# Altium PCB A5000_4MB.pcbdoc
Units mm, origin at the board's own origin, x right, y up, seen from the top; angles counter-clockwise.
Board outline 94.49 x 40.64 mm, 4 copper layers (TopLayer, GND, VCC, BottomLayer), stack 1.659 mm thick; 13 components, 51 nets, 167 pads, 114 vias.
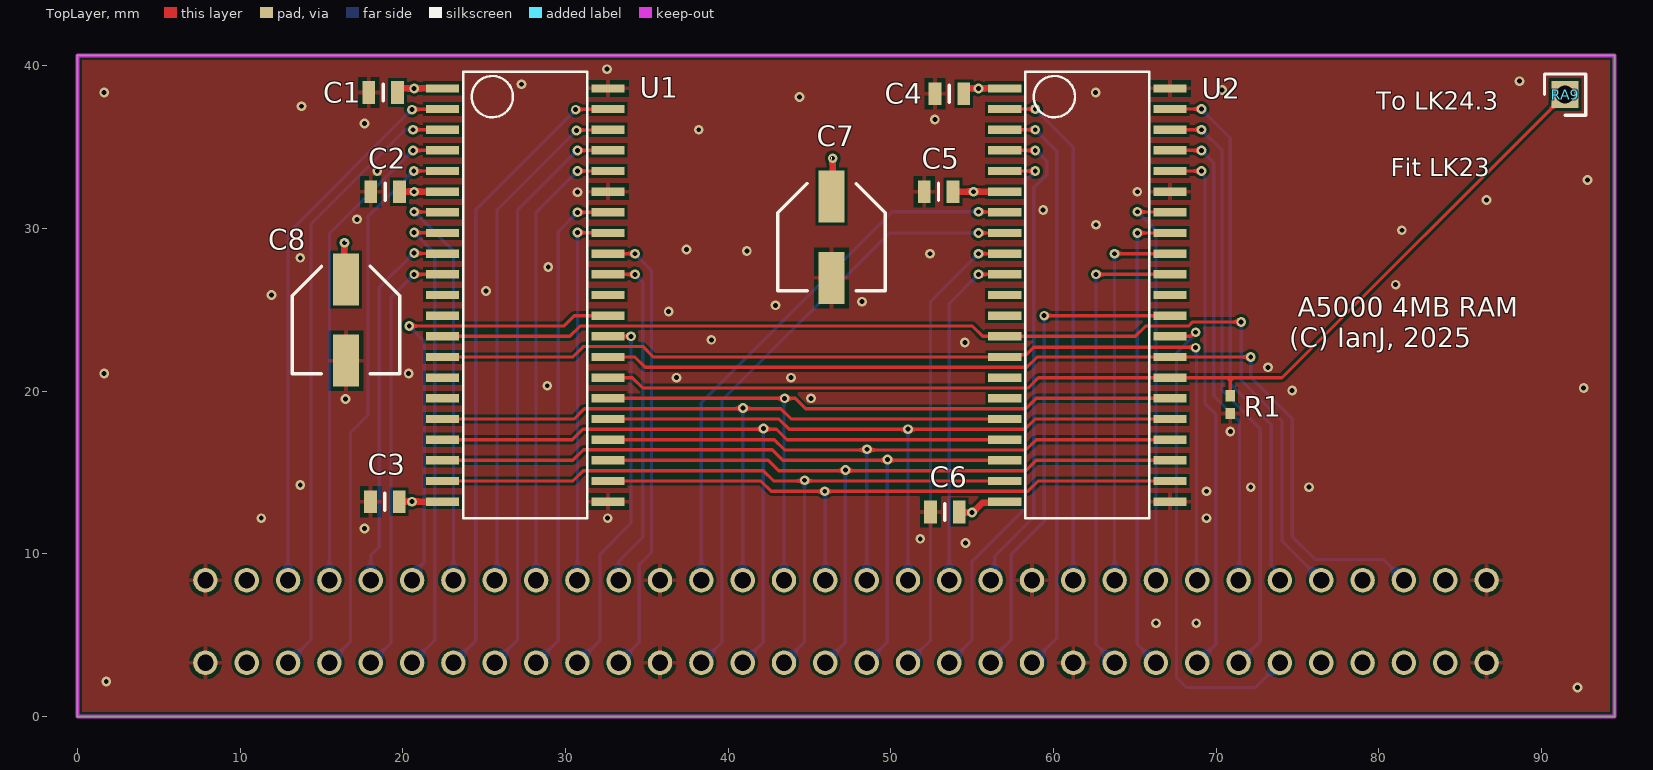
[diagram p0: TopLayer view]
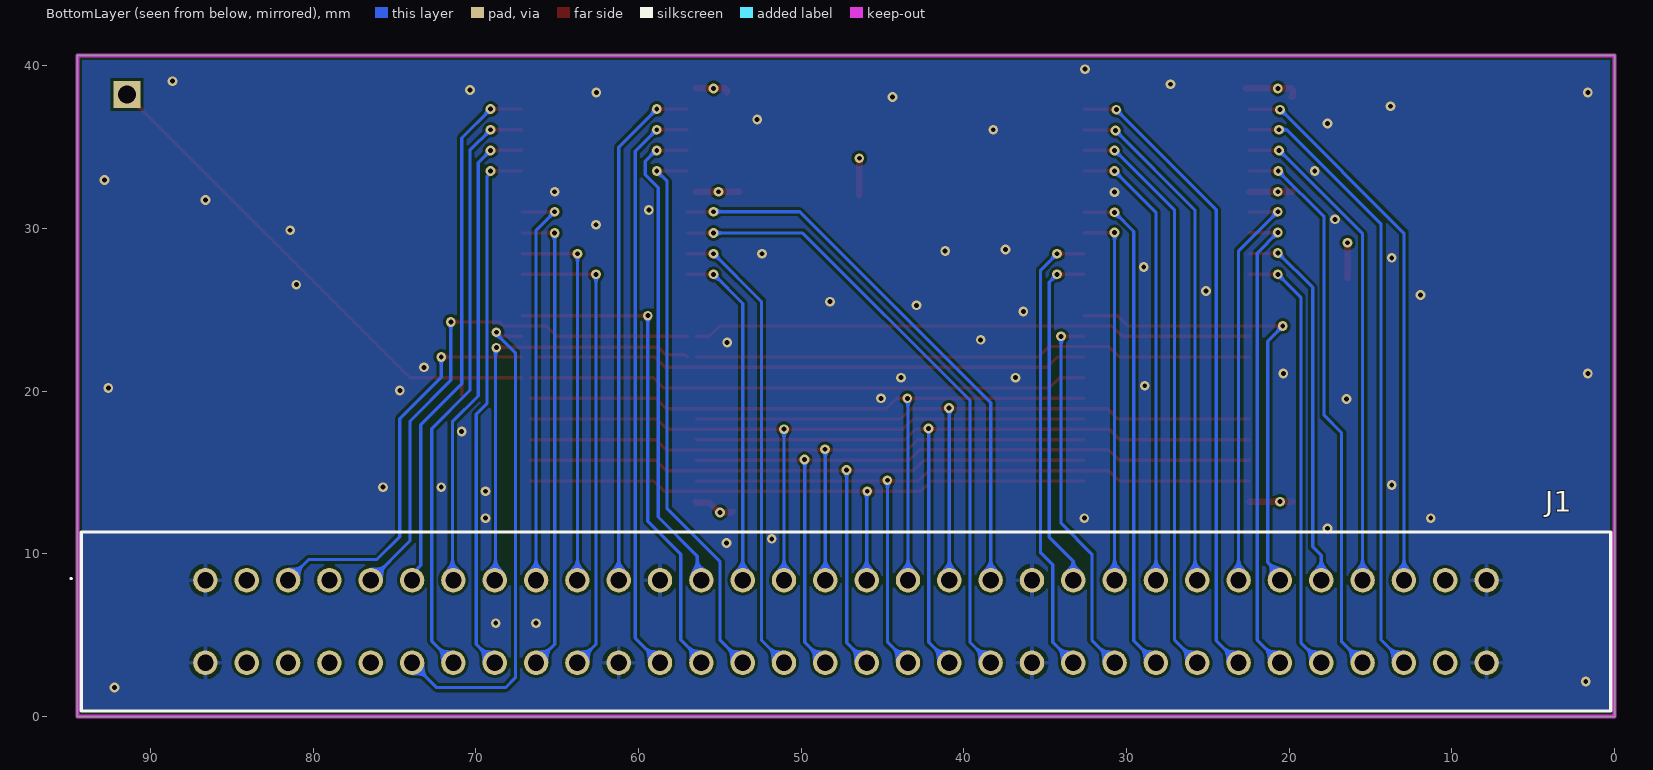
[diagram p1: BottomLayer view, seen from below]
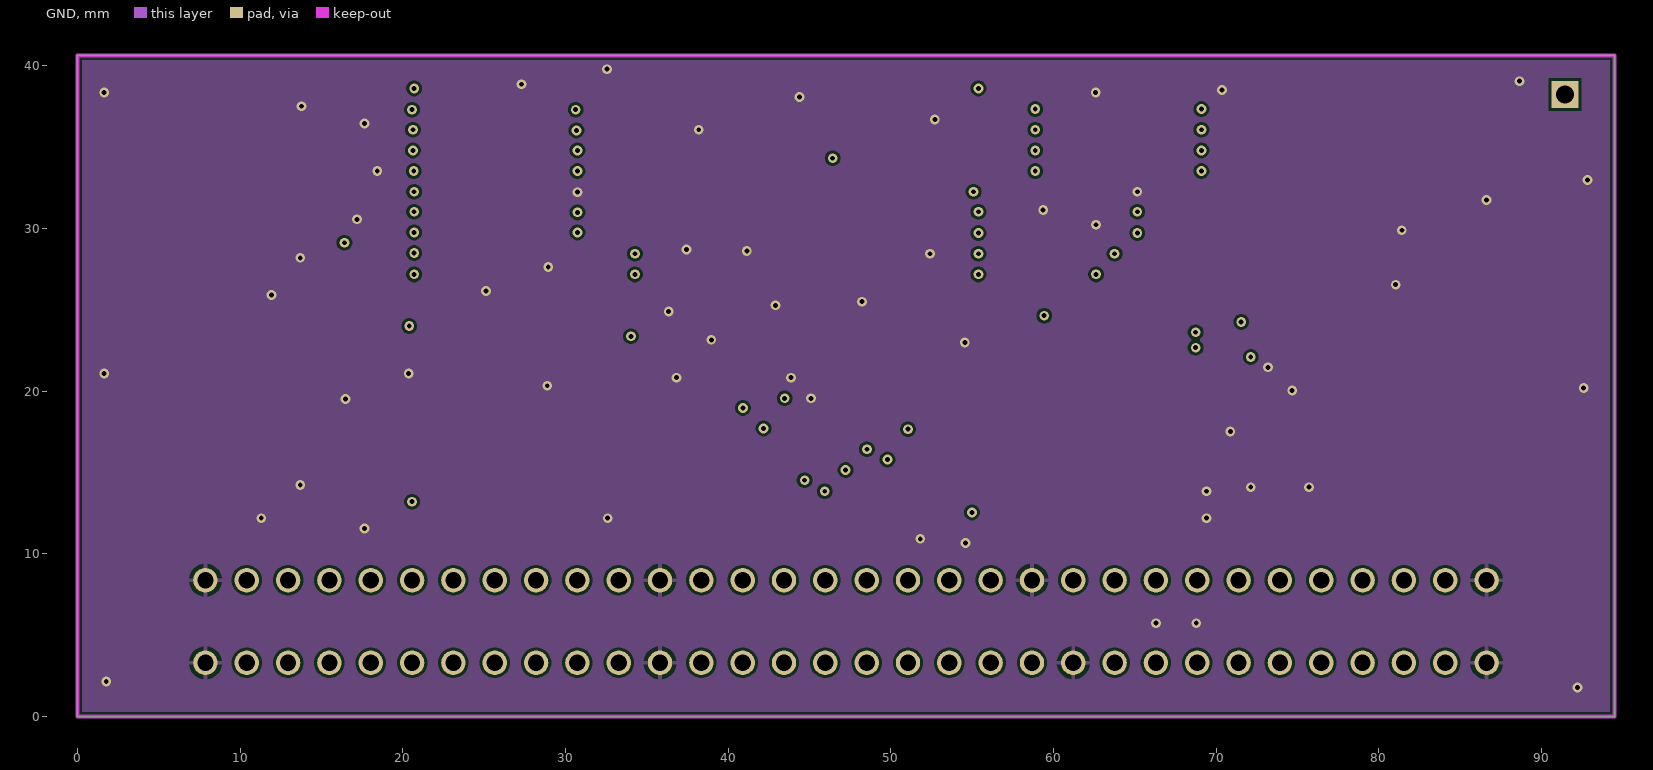
[diagram p2: GND]
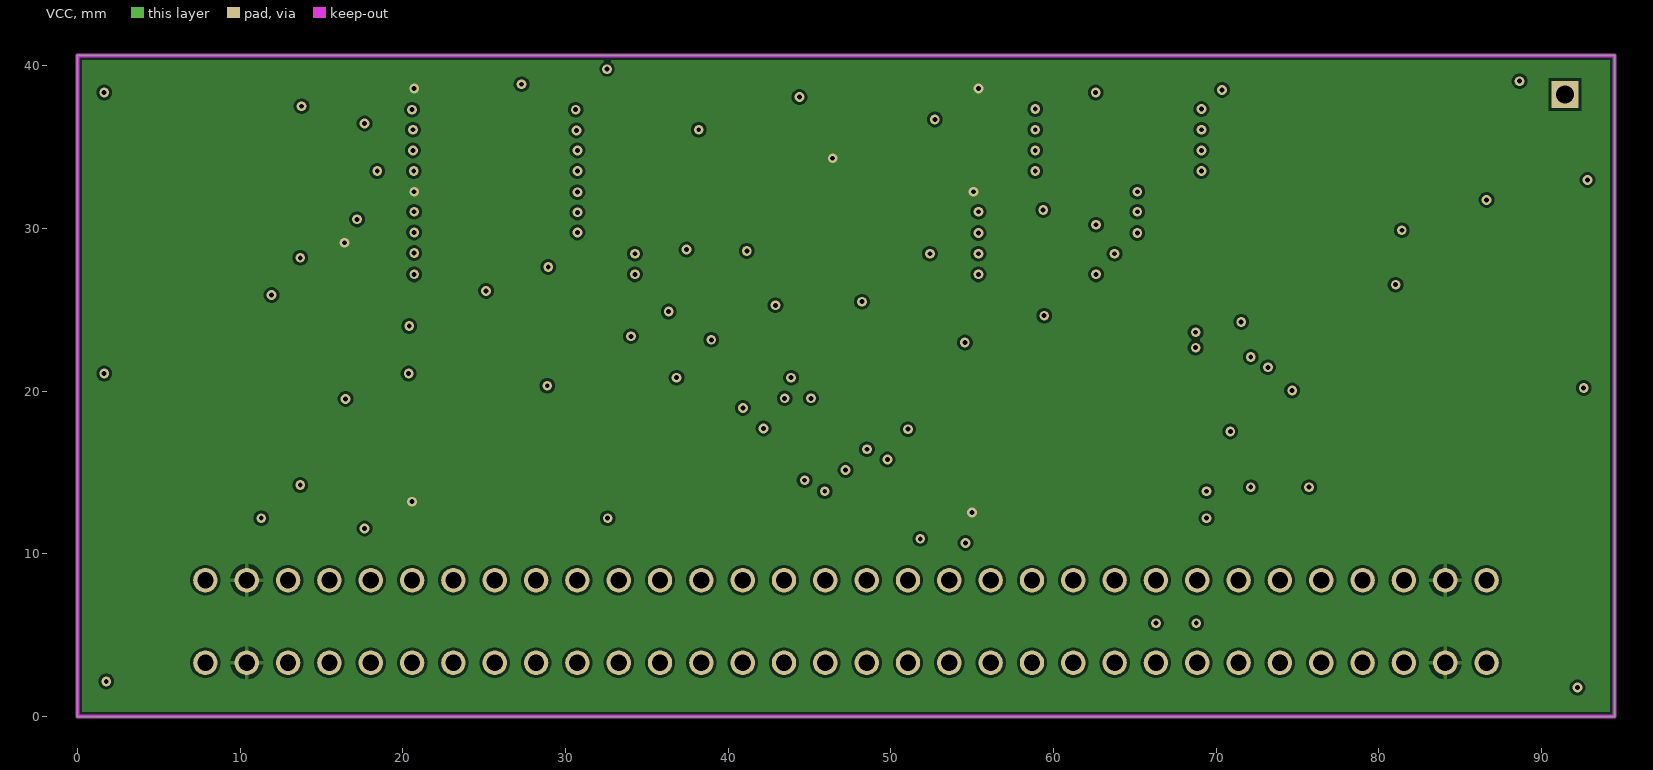
[diagram p3: VCC]
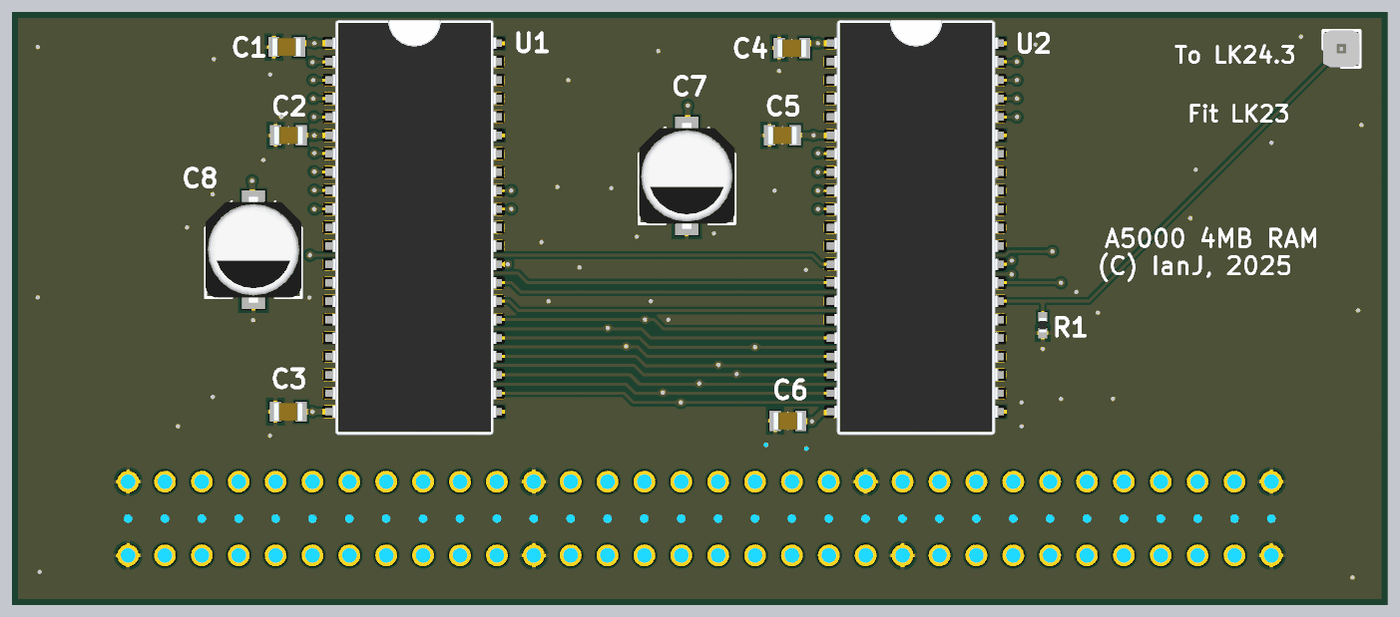
[diagram p4: 3D render of the assembled board from above, using the file's embedded part models]

## Layer stack, top to bottom
TopSolder: solder mask 0.01, Solder Resist, Dk 3.5
TopLayer: signal copper 0.036
Dielectric 1: prepreg 0.2083, PP-022, Dk 4.5
GND: signal copper 0.035
Dielectric 2: core 1.1, Core-043, Dk 4.3
VCC: signal copper 0.035
Dielectric 3: prepreg 0.2083, PP-022, Dk 4.5
BottomLayer: signal copper 0.036
BottomSolder: solder mask 0.01, Solder Resist, Dk 3.5

## Board outline
0,40.64 0,0 94.488,0 94.488,40.64

## Design rules (kind name [scope] priority, off if disabled: settings)
BoardOutlineClearance [All] p1: gap=0 ignorepadtopadclearanceinfootprint=FALSE
Clearance [All] p1: gap=0.17 ignorepadtopadclearanceinfootprint=FALSE except(0.3: Via-Via; 0.5: Via-Hole)
ComponentClearance ComponentClearance_Z2_Z3 [(InComponent('Z2') OR InComponent('Z3')) vs InComponent('No Component')] p1: gap=0 collisioncheckmode=3 verticalgap=0 showdistances=FALSE
ComponentClearance ComponentClearance_U4_J104 [All] p2: gap=0 collisioncheckmode=3 verticalgap=0 showdistances=FALSE
ComponentClearance ComponentClearance_J3_J4 [InComponent('J3') vs InComponent('J4')] p3: gap=0 collisioncheckmode=3 verticalgap=0 showdistances=FALSE
ComponentClearance ComponentClearance_J103_J104 [InComponent('J103') vs InComponent('J104')] p4: gap=0 collisioncheckmode=3 verticalgap=0 showdistances=FALSE
ComponentClearance [All] p5: gap=0.254 collisioncheckmode=3 verticalgap=0.254 showdistances=FALSE
DiffPairsRouting [InDifferentialPairClass('All Differential Pairs')] p1: maxlimit=0.254 minlimit=0.114 mostfreqgap=0.17 toplayer_mingap=0.17 toplayer_minwidth=0.2 toplayer_maxwidth=0.381 toplayer_prefwidth=0.237 midlayer1_prefgap=0.115 midlayer1_minwidth=0.381 midlayer1_maxwidth=0.381 midlayer1_prefwidth=0.381 midlayer2_prefgap=0.115 midlayer2_minwidth=0.381 midlayer2_maxwidth=0.381 midlayer2_prefwidth=0.381 bottomlayer_mingap=0.17 bottomlayer_minwidth=0.2 bottomlayer_maxwidth=0.381 bottomlayer_prefwidth=0.237 maxuncoupledlength=12.7
FabricationTestPointUsage TestPointUsage [All] p1: valid=0 allowmultiple=FALSE
FabricationTestpoint Testpoint [All] p1: side=3 testpointundercomponent=TRUE minsize=1.016 maxsize=2.54 preferedsize=1.524 minholesize=0.508 maxholesize=1.016 preferedholesize=0.813 testpointgrid=0.025 allowsidetop=TRUE allowsidebottom=TRUE usegrid=TRUE gridtolerance=0
HoleSize [All] p1: absolutevalues=TRUE maxlimit=5 minlimit=0.3 maxpercent=80.000 minpercent=20.000
HoleToHoleClearance [All] p1: gap=0.25 allowstackedmicrovias=FALSE
MinimumSolderMaskSliver [All] p1: minsoldermaskwidth=0.02
PlaneClearance [All] p1: clearance=0.2
PlaneConnect [All] p1: pad.planeconnectstyle=Relief pad.reliefexpansion=0.508 pad.reliefentries=4 pad.reliefconductorwidth=0.254 pad.reliefairgap=0.254 via.planeconnectstyle=Direct via.reliefexpansion=0.508 via.reliefentries=4 via.reliefconductorwidth=0.254 via.reliefairgap=0.254
PolygonConnect [All] p1: thpad.connectstyle=Relief thpad.reliefconductorwidth=0.254 thpad.reliefentries=4 thpad.polygonreliefangle="90 Angle" thpad.airgapwidth=0.254 smdpad.connectstyle=Relief smdpad.reliefconductorwidth=0.254 smdpad.reliefentries=4 smdpad.polygonreliefangle="90 Angle" smdpad.airgapwidth=0.254 via.connectstyle=Direct via.reliefconductorwidth=0.254 via.reliefentries=4 via.polygonreliefangle="90 Angle" via.airgapwidth=0.254
RoutingVias [All] p1: holewidth=0.4 width=0.8 viastyle="Through Hole" minholewidth=0.3 minwidth=0.6 maxholewidth=0.4 maxwidth=0.8
SilkToSilkClearance [All] p1: silktosilkclearance=0.1
SilkToSolderMaskClearance SilkscreenOverComponentPads [IsPad] p1: minsilkscreentomaskgap=0.1 clearancetoexposedcopper=TRUE
SolderMaskExpansion [All] p1: expansion=0.075 istentingtop=FALSE
SupplyNets "Schematic Supply Nets_1" [InNet('GND')] p1: voltage=0.000
SupplyNets "Schematic Supply Nets" [InNet('VCC')] p2: voltage=0.000
Width [All] p1: maxlimit=5 minlimit=0.15 preferedwidth=0.2
19 further rules are at their usual default settings.

## Components (designator, comment, footprint, x,y, rotation, side; value= is the part's Value field where it differs from the comment)
C1 "100nF" 0805cap 18.796,38.354 r180 top
C2 "100nF" 0805cap 18.923,32.258 r180 top
C3 "100nF" 0805cap 18.901,13.208 r180 top
C4 "100nF" 0805cap 53.594,38.274 r180 top
C5 "100nF" 0805cap 52.937,32.258 r180 top
C6 "100nF" 0805cap 53.318,12.573 r180 top
C7 "47uF" EEE1AA101SP 46.355,29.464 r270 top
C8 "47uF" EEE1AA101SP 16.51,24.373 r270 top
J1 "09031646922" 09031646922 86.614,8.382 r0 bottom locked
R1 "10K" RESC1005X40N 70.866,19.177 r90 top
RA9 "90120-0761" HDRV1W90P0X254_1X1_232X249X560P 91.44,38.227 r90 top
U1 "IS41C16105C" SOJ-42 27.537,25.908 r270 top locked
U2 "IS41C16105C" SOJ-42 62.081,25.908 r270 top locked

## Footprints (in the part's own frame and the unit in brackets; to place one, negate y for a bottom-side part, rotate by r counter-clockwise, add the part's x,y. Pads: shape width x height; smd on the part's side, far side on the other; paste and mask are expansions set on the pad)
0805cap [mm]
  rect 0.78x1.39 smd: 1(-0.88,0) 2(0.88,0)
  silkscreen extent 0,-0.53 0,0.53, body extent -1,-0.63 1,0.63, height 0.6
09031646922 [mm]
  round 1.5 hole 1: A1(0,0) A2(-2.54,0) A3(-5.08,0) A4(-7.62,0) A5(-10.16,0) A6(-12.7,0) A7(-15.24,0) A8(-17.78,0) A9(-20.32,0) A10(-22.86,0) A11(-25.4,0) A12(-27.94,0) A13(-30.48,0) A14(-33.02,0) A15(-35.56,0) A16(-38.1,0) A17(-40.64,0) A18(-43.18,0) A19(-45.72,0) A20(-48.26,0) A21(-50.8,0) A22(-53.34,0) A23(-55.88,0) A24(-58.42,0) A25(-60.96,0) A26(-63.5,0) A27(-66.04,0) A28(-68.58,0) A29(-71.12,0) A30(-73.66,0) A31(-76.2,0) A32(-78.74,0) C1(0,5.08) C2(-2.54,5.08) C3(-5.08,5.08) C4(-7.62,5.08) C5(-10.16,5.08) C6(-12.7,5.08) C7(-15.24,5.08) C8(-17.78,5.08) C9(-20.32,5.08) C10(-22.86,5.08) C11(-25.4,5.08) C12(-27.94,5.08) C13(-30.48,5.08) C14(-33.02,5.08) C15(-35.56,5.08) C16(-38.1,5.08) C17(-40.64,5.08) C18(-43.18,5.08) C19(-45.72,5.08) C20(-48.26,5.08) C21(-50.8,5.08) C22(-53.34,5.08) C23(-55.88,5.08) C24(-58.42,5.08) C25(-60.96,5.08) C26(-63.5,5.08) C27(-66.04,5.08) C28(-68.58,5.08) C29(-71.12,5.08) C30(-73.66,5.08) C31(-76.2,5.08) C32(-78.74,5.08)
  silkscreen extent -86.37,-2.96 8.3,8.04, body extent -86.37,-2.96 7.63,8.04, height 13.15
EEE1AA101SP [mm]
  rect 3.2x1.6 smd: 1(-2.5,0) 2(2.5,0)
  silkscreen extent -4.88,-3.3 3.3,3.3, body extent 0,0 0,0
HDRV1W90P0X254_1X1_232X249X560P [mm]
  rect 1.65x1.65 hole 1.1: 1(0,0)
  silkscreen extent -1.27,-1.27 1.27,1.27, body extent -1.27,-1.25 1.27,1.25, height 5.37
RESC1005X40N [mm]
  rect 0.7x0.6 smd: 1(-0.55,0) 2(0.55,0)
  body extent -0.5,-0.25 0.5,0.25, height 0.4
SOJ-42 [mil]
  rect 20x80 smd mask+7.87: 1(-500,-200) 2(-450,-200) 3(-400,-200) 4(-350,-200) 5(-300,-200) 6(-250,-200) 7(-200,-200) 8(-150,-200) 9(-100,-200) 10(-50,-200) 11(0,-200) 12(50,-200) 13(100,-200) 14(150,-200) 15(200,-200) 16(250,-200) 17(300,-200) 18(350,-200) 19(400,-200) 20(450,-200) 21(500,-200) 22(500,200) 23(450,200) 24(400,200) 25(350,200) 26(300,200) 27(250,200) 28(200,200) 29(150,200) 30(100,200) 31(50,200) 32(0,200) 33(-50,200) 34(-100,200) 35(-150,200) 36(-200,200) 37(-250,200) 38(-300,200) 39(-350,200) 40(-400,200) 41(-450,200) 42(-500,200)
  silkscreen extent -540,-150 540,150, body extent -563,-220 563,225, height 149

## Part data
C1 C2 C3 C4 C5 C6: library part 100nF0805, "Capacitor", Arrow Part Number=C2012X7R1H104K125AM, LCSC Part #=C111492, Manufacturer_Name=TDK, Mouser Part Number=810-C2012X7R1H104KT5, Arrow Price/Stock=https://www.arrow.com/en/products/c2012x7r1h104k125am/tdk, Datasheet Link=https://product.tdk.com/info/en/catalog/datasheets/mlcc_commercial_midvoltage_en.pdf, Height=1.45mm, Manufacturer_Part_Number=C2012X7R1H104K125AM, Mouser Price/Stock=https://www.mouser.com/Search/Refine.aspx?Keyword=810-C2012X7R1H104KT5
C7 C8: library part EEE1VA470WP, "Capacitor Polarised", Manufacturer_Name=Panasonic, Datasheet Link=http://industrial.panasonic.com/cdbs/www-data/pdf/RDE0000/ABA0000C1145.pdf, Height=7.8mm, Manufacturer_Part_Number=EEE1VA470WP
J1: "Connector", Manufacturer_Name=HARTING, Mouser Part Number=617-09-03-164-6922, Arrow Part Number=09031646922, Arrow Price/Stock=https://www.arrow.com/en/products/09031646922/harting?region=nac, Datasheet Link=https://b2b.harting.com/files/download/PRD/PDF_DS/PDF_DS_09031200201.pdf, Manufacturer_Part_Number=09031646922, Mouser Price/Stock=https://www.mouser.co.uk/ProductDetail/HARTING/09031646922?qs=UV5Tb6pF94VtKUzITEf3rQ%3D%3D
R1: library part CRCW040210K0FKEDHP, "Resistor", LCSC Part #=C71617, Manufacturer_Name=Vishay, Mouser Part Number=71-CRCW040210K0FKEDH, Arrow Part Number=CRCW040210K0FKEDHP, Arrow Price/Stock=https://www.arrow.com/en/products/crcw040210k0fkedhp/vishay?region=nac, Datasheet Link=http://www.vishay.com/docs/20035/dcrcwe3.pdf, Height=0.4mm, Manufacturer_Part_Number=CRCW040210K0FKEDHP, Mouser Price/Stock=https://www.mouser.co.uk/ProductDetail/Vishay-Dale/CRCW040210K0FKEDHP?qs=FlFvgi4rxBxmIiaeyFjrkA%3D%3D
RA9: "Connector", Manufacturer_Name=Molex, Mouser Part Number=538-90120-0761, Datasheet Link=https://www.molex.com/pdm_docs/sd/901200761_sd.pdf, Height=5.6mm, Manufacturer_Part_Number=90120-0761, Mouser Price/Stock=https://www.mouser.co.uk/ProductDetail/Molex/90120-0761?qs=PvP5v7Eimsn%2F58TpDaAAow%3D%3D
U1 U2: library part DRAM_1MX16_SOJ

## Via types
v1: diameter 0.6, hole 0.3, TopLayer to BottomLayer, tented both sides, 114 vias

## Nets (pads, with @x,y where several pads share a name; then routed paths per layer and width w, separated by ;. In a path a pad name is that pad's centre, name@x,y a point inside that pad or via, vN(x,y) a via of type N, cw(c..) or ccw(c..) an arc to the next point about the centre after c; other vN are vias at no path point)
Cas0n: J1.A27 U1.31 | length 28.8
  TopLayer w0.2: v1(20.402,24.002) 29.896,24.002 30.532,24.638 U1.31
  BottomLayer w0.2: v1(20.402,24.002) 21.324,23.08 21.324,9.477 20.574,8.727 J1.A27
Cas1n: J1.C23 U1.30 | length 22.8
  TopLayer w0.2: U1.30 v1(34.024,23.368)
  BottomLayer w0.2: J1.C23 32.131,4.699 32.131,9.985 34.024,11.878 v1(34.024,23.368)
Cas2n: J1.C13 U2.31 | length 30.4
  TopLayer w0.2: v1(59.424,24.638) U2.31
  BottomLayer w0.2: J1.C13 56.134,3.451 57.404,4.721 57.404,9.979 59.424,11.999 v1(59.424,24.638)
Cas3n: J1.C6 U2.30 | length 30.6
  TopLayer w0.2: U2.30 68.432,23.368 68.686,23.622 v1(68.734,23.622)
  BottomLayer w0.2: v1(68.734,23.622) 68.734,23.522 67.564,22.352 67.564,2.387 68.173,1.778 72.39,1.778 J1.C6
D0: J1.C30 U1.3 | length 38
  TopLayer w0.2: v1(20.627,36.068) U1.3
  BottomLayer w0.2: J1.C30 14.356,4.704 14.356,30.258 20.167,36.068 v1(20.627,36.068)
D1: J1.A30 U1.2 | length 34
  TopLayer w0.2: v1(20.574,37.301) 20.593,37.319 22.438,37.319 U1.2
  BottomLayer w0.2: J1.A30 12.954,29.718 20.537,37.301 v1(20.574,37.301)
D2: J1.A29 U1.4 | length 30.4
  TopLayer w0.2: v1(20.627,34.798) U1.4
  BottomLayer w0.2: J1.A29 15.494,29.665 v1@20.622,34.793
D3: J1.C29 U1.5 | length 34.2
  TopLayer w0.2: v1(20.674,33.528) U1.5
  BottomLayer w0.2: J1.C29 16.784,4.592 16.784,17.427 17.862,18.505 17.862,30.715 v1(20.674,33.528)
D4: J1.A28 U1.9 | length 23
  TopLayer w0.2: v1(20.701,28.484) 20.719,28.466 22.439,28.466 U1.9
  BottomLayer w0.2: J1.A28 18.034,9.906 18.564,10.436 18.564,26.374 20.674,28.484 v1(20.701,28.484)
D5: J1.C28 U1.10 | length 26.7
  TopLayer w0.2: v1(20.701,27.178) U1.10
  BottomLayer w0.2: J1.C28 19.282,4.55 19.282,25.759 v1(20.701,27.178)
D6: J1.C27 U1.8 | length 29.3
  TopLayer w0.2: v1(20.701,29.754) 20.719,29.736 22.439,29.736 U1.8
  BottomLayer w0.2: J1.C27 21.971,4.699 21.971,28.484 v1(20.701,29.754)
D7: J1.A26 U1.7 | length 25.4
  TopLayer w0.2: v1(20.701,31.029) 20.722,31.009 22.436,31.009 U1.7
  BottomLayer w0.2: v1(20.701,31.029) 23.114,28.616 J1.A26
D8: J1.A25 U1.40 | length 31.8
  TopLayer w0.2: v1(30.674,36.026) 30.695,36.047 32.595,36.047 U1.40
  BottomLayer w0.2: J1.A25 25.793,8.521 25.793,31.127 v1@30.734,36.068
D9: J1.C26 U1.41 | length 39.2
  TopLayer w0.2: v1(30.629,37.301) 30.648,37.319 32.598,37.319 U1.41
  BottomLayer w0.2: J1.C26 24.484,4.672 24.484,31.148 v1@30.674,37.338
D10: J1.C25 U1.39 | length 35.5
  TopLayer w0.2: v1(30.734,34.798) U1.39
  BottomLayer w0.2: J1.C25 27.051,4.699 27.051,31.115 v1(30.734,34.798)
D11: J1.A24 U1.38 | length 28.1
  TopLayer w0.2: v1(30.734,33.528) U1.38
  BottomLayer w0.2: J1.A24 28.194,30.988 v1(30.734,33.528)
D12: J1.A23 U1.35 | length 23.3
  TopLayer w0.2: v1(30.734,29.754) 30.752,29.736 32.599,29.736 U1.35
  BottomLayer w0.2: J1.A23 v1(30.734,29.754)
D13: J1.C24 U1.36 | length 30.6
  TopLayer w0.2: v1(30.734,30.988) U1.36
  BottomLayer w0.2: J1.C24 29.557,4.665 29.557,29.811 v1(30.734,30.988)
D14: J1.A22 U1.33 | length 21.3
  TopLayer w0.2: U1.33 v1(34.268,27.178)
  BottomLayer w0.2: J1.A22 33.274,9.554 34.753,11.033 34.753,26.692 v1(34.268,27.178)
D15: J1.C22 U1.34 | length 28.1
  TopLayer w0.2: U1.34 v1(34.268,28.448)
  BottomLayer w0.2: J1.C22 34.544,4.572 34.544,9.329 35.284,10.068 35.284,27.432 v1(34.268,28.448)
D16: J1.C20 U2.8 | length 38.3
  TopLayer w0.2: v1(55.384,29.718) U2.8
  BottomLayer w0.2: J1.C20 39.624,4.572 39.624,19.431 49.911,29.718 v1(55.384,29.718)
D17: J1.A20 U2.7 | length 34.4
  TopLayer w0.2: v1(55.384,31.029) 55.405,31.009 56.98,31.009 U2.7
  BottomLayer w0.2: J1.A20 38.354,19.292 50.091,31.029 v1(55.384,31.029)
D18: J1.C15 U2.9 | length 28.6
  TopLayer w0.2: v1(55.384,28.448) U2.9
  BottomLayer w0.2: J1.C15 52.438,4.686 52.438,25.502 v1(55.384,28.448)
D19: J1.A14 U2.10 | length 21.2
  TopLayer w0.2: v1(55.384,27.178) U2.10
  BottomLayer w0.2: J1.A14 53.594,25.388 v1(55.384,27.178)
D20: J1.A13 U2.4 | length 30
  TopLayer w0.2: U2.4 v1(58.879,34.798)
  BottomLayer w0.2: J1.A13 56.383,8.631 56.383,9.862 58.785,12.265 58.785,32.508 59.584,33.307 59.584,34.142 58.928,34.798 v1(58.879,34.798)
D21: J1.C14 U2.5 | length 34.3
  TopLayer w0.2: U2.5 v1(58.879,33.528)
  BottomLayer w0.2: J1.C14 54.981,4.689 54.981,9.502 58.244,12.765 58.244,32.893 v1(58.879,33.528)
D22: J1.A11 U2.2 | length 31.8
  TopLayer w0.2: U2.2 v1(58.879,37.338)
  BottomLayer w0.2: v1(58.879,37.338) 61.214,35.003 J1.A11
D23: J1.C12 U2.3 | length 35.8
  TopLayer w0.2: U2.3 v1(58.879,36.068)
  BottomLayer w0.2: J1.C12 60.198,4.826 60.198,8.292 cw(c61.214,8.382) 60.198,8.472 60.198,34.749 v1(58.879,36.068)
D24: J1.C10 U2.33 | length 28.9
  TopLayer w0.2: v1(62.611,27.178) U2.33
  BottomLayer w0.2: v1(62.611,27.178) 62.611,4.445 J1.C10
D25: J1.A10 U2.34 | length 23.5
  TopLayer w0.2: v1(63.754,28.448) U2.34
  BottomLayer w0.2: J1.A10 v1(63.754,28.448)
D26: J1.A9 U2.36 | length 25.1
  TopLayer w0.2: v1(65.151,31.029) 65.172,31.009 67.14,31.009 U2.36
  BottomLayer w0.2: v1(65.151,31.029) 65.582,30.598 66.294,29.886 J1.A9
D27: J1.C9 U2.35 | length 28.9
  TopLayer w0.2: v1(65.151,29.718) U2.35
  BottomLayer w0.2: v1(65.151,29.718) 65.151,4.445 J1.C9
D28: J1.A7 U2.39 | length 29.3
  TopLayer w0.2: U2.39 v1(69.088,34.798)
  BottomLayer w0.2: v1(69.088,34.798) 69.85,34.036 69.85,19.7 71.436,18.114 71.436,8.444 J1.A7
D29: J1.C8 U2.38 | length 33
  TopLayer w0.2: U2.38 v1(69.088,33.528)
  BottomLayer w0.2: J1.C8 69.974,4.442 69.974,18.587 69.304,19.257 69.304,33.211 69.088,33.427 v1(69.088,33.528)
D30: J1.A6 U2.41 | length 32.9
  TopLayer w0.2: U2.41 v1(69.088,37.338)
  BottomLayer w0.2: v1(69.088,37.338) 70.866,35.56 70.866,20.448 73.384,17.931 73.384,9.297 73.564,9.117 73.564,9.084 73.914,8.734 J1.A6
D31: J1.C7 U2.40 | length 36.7
  TopLayer w0.2: U2.40 v1(69.088,36.068)
  BottomLayer w0.2: v1(69.088,36.068) 70.358,34.798 70.358,20.038 72.708,17.688 72.708,4.636 J1.C7
GND: C1.2 C2.2 C3.2 C4.2 C5.2 C6.2 C7.2 C8.2 J1.A1 J1.A12 J1.A21 J1.A32 J1.C1 J1.C11 J1.C21 J1.C32 R1.1 U1.22 U1.37 U1.42 U2.22 U2.37 U2.42
  other v1: 92.202,1.778 1.778,2.159 66.294,5.741 68.773,5.741 54.588,10.668 51.804,10.922 17.653,11.557 11.303,12.192 32.595,12.192 69.404,12.192 69.404,13.847 72.124,14.097 75.704,14.097 13.704,14.224 70.866,17.526 16.488,19.52 45.085,19.558 74.664,20.038 92.583,20.193 28.882,20.332 36.83,20.828 43.871,20.828 1.651,21.082 20.363,21.078 73.178,21.463 54.549,22.983 38.967,23.154 36.344,24.892 42.904,25.273 48.222,25.498 11.938,25.908 25.124,26.162 81.026,26.543 28.944,27.629 13.704,28.194 52.399,28.444 41.148,28.616 37.443,28.702 81.407,29.886 62.611,30.226 17.194,30.558 59.363,31.141 86.614,31.75 30.734,32.231 65.151,32.258 92.818,32.977 18.433,33.528 38.193,36.068 17.653,36.449 52.705,36.703 13.781,37.507 44.382,38.073 1.651,38.354 62.589,38.354 70.358,38.512 27.305,38.862 88.646,39.052 32.56,39.791
Oe3n: J1.A3 U1.29 U2.29 | length 59.1
  TopLayer w0.2: U1.29@32.626,22.098 34.268,22.098 34.903,21.463 58.356,21.463 58.991,22.098 66.145,22.098 ; U2.29 70.008,22.098 v1(72.124,22.098)
  BottomLayer w0.2: v1(72.124,22.098) 72.124,20.852 74.664,18.312 74.664,11.061 76.073,9.652 80.264,9.652 J1.A3
Ra0: J1.A19 U1.17 U2.17 | length 45.1
  TopLayer w0.2: U1.17@22.466,18.288 30.532,18.288 31.168,18.924 43.234,18.924 43.871,18.288 U2.17@56.466,18.288
  BottomLayer w0.2: J1.A19 v1@40.894,18.924
  other v1: 40.91,18.972
Ra1: J1.C19 U1.18 U2.18 | length 49.4
  TopLayer w0.2: U1.18@22.466,17.018 30.43,17.018 31.075,17.663 42.972,17.663 43.617,17.018 U2.18@56.466,17.018
  BottomLayer w0.2: J1.C19 42.164,4.572 42.164,17.351 v1@42.164,17.663
  other v1: 42.18,17.71
Ra2: J1.C16 U1.19 U2.19 | length 47.5
  TopLayer w0.2: U1.19@22.466,15.748 30.458,15.748 31.11,16.401 42.709,16.401 43.362,15.748 53.953,15.748 U2.19@56.466,15.748
  BottomLayer w0.2: J1.C16 49.774,4.562 v1@49.774,15.748
  other v1: 49.79,15.796
Ra3: J1.C18 U1.20 U2.20 | length 46.2
  TopLayer w0.2: U1.20@22.466,14.478 30.458,14.478 31.084,15.105 42.166,15.105 42.793,14.478 U2.20@56.466,14.478
  BottomLayer w0.2: J1.C18 44.686,4.554 v1@44.686,14.478
  other v1: 44.702,14.526
Ra4: J1.A17 U1.23 U2.23 | length 40
  TopLayer w0.2: U1.23@32.626,14.478 42.015,14.478 42.65,13.843 58.42,13.843 59.055,14.478 U2.23@66.626,14.478
  BottomLayer w0.2: J1.A17 v1@45.974,13.843
  other v1: 45.936,13.847
Ra5: J1.C17 U1.24 U2.24 | length 46.8
  TopLayer w0.2: U1.24@32.626,15.748 42.455,15.748 43.099,15.105 58.285,15.105 58.928,15.748 U2.24@66.626,15.748
  BottomLayer w0.2: J1.C17 47.203,4.531 v1@47.203,15.105
  other v1: 47.219,15.152
Ra6: J1.A16 U1.25 U2.25 | length 42.5
  TopLayer w0.2: U1.25@32.626,17.018 42.839,17.018 43.474,16.383 58.297,16.383 58.932,17.018 U2.25@66.626,17.018
  BottomLayer w0.2: J1.A16 v1@48.514,16.383
  other v1: 48.53,16.431
Ra7: J1.A15 U1.26 U2.26 | length 43.8
  TopLayer w0.2: U1.26@32.626,18.288 43.109,18.288 43.744,17.653 51.044,17.653 v1(51.054,17.663) 51.064,17.653 58.244,17.653 58.879,18.288 U2.26@66.626,18.288
  BottomLayer w0.2: J1.A15 v1(51.054,17.663)
Ra8: J1.A18 U1.27 U2.27 | length 45.7
  TopLayer w0.2: U1.27@32.626,19.558 v1(43.474,19.558) 44.128,19.558 44.762,18.924 58.294,18.924 58.928,19.558 U2.27@66.626,19.558
  BottomLayer w0.2: J1.A18 43.434,19.518 v1(43.474,19.558)
Ra9: R1.2 RA9.1 U1.28 U2.28 | length 67.7
  TopLayer w0.2: U1.28@32.626,20.828 34.118,20.828 34.753,20.193 58.435,20.193 59.07,20.828 U2.28@66.626,20.828 ; U2.28 70.866,20.828 ; R1.2 70.866,20.828 ; RA9.1@91.868,38.655 RA9.1 74.041,20.828 70.866,20.828
Ras1n: J1.A8 U1.14 U2.14 | length 60.9
  TopLayer w0.2: U1.14@22.466,22.098 30.461,22.098 31.114,22.751 34.753,22.751 35.406,22.098 U2.14@56.466,22.098 ; U2.14 57.136,22.233 58.317,22.233 58.785,22.702 68.704,22.702 v1(68.734,22.672)
  BottomLayer w0.2: v1(68.734,22.672) 68.784,22.622 68.784,8.432 J1.A8
VCC: C1.1 C2.1 C3.1 C4.1 C5.1 C6.1 C7.1 C8.1 J1.A2 J1.A31 J1.C2 J1.C31 U1.1 U1.6 U1.21 U2.1 U2.6 U2.21 | length 21.1
  TopLayer w0.2: C8.1@16.418,26.965 C8.1 ; C1.1 C1.1@19.966,38.064 ; C7.1 C7.1@46.424,32.033
  TopLayer w0.4: C8.1@16.418,26.965 v1(16.418,29.121) ; C3.1 v1(20.574,13.208) U1.21@22.466,13.208 ; C1.1@19.79,38.1 19.79,38.532 19.866,38.608 U1.1@22.683,38.608 ; C2.1 v1(20.701,32.258) U1.6@22.466,32.258 ; C7.1@46.424,32.033 v1(46.424,34.312) ; C5.1 U2.6@56.466,32.258 ; C6.1 54.225,12.546 v1(54.981,12.546) 55.019,12.584 55.08,12.584 55.65,13.154 56.412,13.154 U2.21@56.466,13.208 ; C4.1@54.568,38.354 54.568,38.512 54.664,38.608 U2.1@56.466,38.608
  other v1: 55.087,32.258 20.701,38.608 55.384,38.608
Wr3n: J1.A5 U1.13 U2.13 | length 67.3
  TopLayer w0.2: U1.13@22.466,23.368 30.278,23.368 30.913,24.004 55.002,24.004 55.638,23.368 U2.13@56.466,23.368 ; U2.13 65.024,23.368 65.661,24.005 68.311,24.005 68.563,24.257 v1(71.533,24.257)
  BottomLayer w0.2: v1(71.533,24.257) 71.533,20.669 74.041,18.161 74.041,10.795 J1.A5
pads on no net: J1.A4 J1.C3 J1.C4 J1.C5 U1.11 U1.12 U1.15 U1.16 U1.32 U2.11 U2.12 U2.15 U2.16 U2.32

## Polygon pours and split planes (outlines as drawn)
GND on GND "NONET_L-01_P-001" (solid, pour order 1): 0,0 94.488,0 94.488,40.64 0,40.64
VCC on VCC "NONET_L-01_P-001" (solid, pour order 2): 0,0 94.488,0 94.488,40.64 0,40.64
GND on TopLayer "NONET_L-01_P-001" (solid, remove dead copper, pour order 0): 0,0 94.488,0 94.488,40.64 0,40.64
GND on BottomLayer "NONET_L-01_P-001" (solid, remove dead copper, pour order 3): 0,0 94.488,0 94.488,40.64 0,40.64

## Keep-outs
KeepOutLayer:
  the board outline again, w0.254

## Silkscreen, mask and mechanical layers (free items; w line width, h text height)
TopOverlay:
  text "To LK24.3" at 79.829,37.284 h1.1
  text "Fit LK23" at 80.718,33.22 h1.1
  text "A5000 4MB RAM" at 75.003,24.584 h1.2
  text "(C) IanJ, 2025" at 74.495,22.698 h1.2
Shape:
  the board outline again, w0.254